# EAGLE board CT_schematic (EAGLE 7.6.0)

Size 204.93 x 80 mm. Coordinates in mm from the lower left corner, seen from the top.
Outline: 104.93,0 204.93,0 204.93,80 104.93,80 104.93,0
Copper layers (1*16): Top 0.035mm / dielectric 1.5mm / Bottom 0.035mm
Design rules "default": minimum track width 10mil, minimum drill 24mil, track to track 8mil, track to pad 8mil, pad to pad 8mil, via to via 8mil, smd to smd 8mil, copper to edge 40mil, drill to drill 8mil, minimum pad ring 10mil, minimum via ring 8mil, stop-mask expansion 4mil, vias tented up to drill 0mil, thermal gap 10mil

## Footprints (pad centres in the part's own frame; a part is rotated, then mirrored left to right if it is on the bottom)
C0402 = smd 0.5 x 0.5: 1 -0.508,0; 2 0.508,0
C0603 = smd 0.8 x 0.8: 1 -0.762,0; 2 0.762,0
C0805 = smd 1.2 x 1.3: 1 -1.016,0; 2 1.016,0
C1210 = smd 1.2 x 2.5: 1 -1.524,0; 2 1.524,0
C1206 = smd 1.3 x 1.6: 1 -1.524,0; 2 1.524,0
2220 = smd 1.85 x 5.5: 1 -2.55,0; 2 2.55,0
EXV-9B = smd 2.718 x 1.778: 1 -2.108,0; 2 2.108,0
R0603 = smd 0.8 x 0.8: 1 -0.762,0; 2 0.762,0
EXV-9H = smd 3.505 x 1.676: 1 -2.857,0; 2 2.857,0
IND_PM3316 = smd 2.921 x 2.794: 1 -5.144,0; 2 5.144,0
DR1040 = smd 1.6 x 3.2: 1 -4.458,0; 2 4.458,0
WE-HCI_7030/7040/7050 = smd 2.5 x 3: 1 -2.45,0; 2 2.45,0
PJ-037B_PACKAGE = drill 3.7 square: 1 12,0 | drill 3.2 square: 2 6,0
BFBGA-684 = smd 0.533 x 0.533: A1 -10.8,10.8; A2 -10,10.8; A3 -9.2,10.8; A4 -8.4,10.8; A5 -7.6,10.8; A6 -6.8,10.8; A7 -6,10.8; A8 -5.2,10.8; A9 -4.4,10.8; A10 -3.6,10.8; A11 -2.8,10.8; A12 -2,10.8; A13 -1.2,10.8; A14 -0.4,10.8; A15 0.4,10.8; A16 1.2,10.8; A17 2,10.8; A18 2.8,10.8; A19 3.6,10.8; A20 4.4,10.8; A21 5.2,10.8; A22 6,10.8; A23 6.8,10.8; A24 7.6,10.8; A25 8.4,10.8; A26 9.2,10.8; A27 10,10.8; A28 10.8,10.8; AA1 -10.8,-5.2; AA2 -10,-5.2; AA3 -9.2,-5.2; AA4 -8.4,-5.2; AA5 -7.6,-5.2; AA6 -6.8,-5.2; AA7 -6,-5.2; AA8 -5.2,-5.2; AA9 -4.4,-5.2; AA10 -3.6,-5.2; AA11 -2.8,-5.2; AA12 -2,-5.2; AA13 -1.2,-5.2; AA14 -0.4,-5.2; AA15 0.4,-5.2; AA16 1.2,-5.2; AA17 2,-5.2; AA18 2.8,-5.2; AA19 3.6,-5.2; AA20 4.4,-5.2; AA21 5.2,-5.2; AA22 6,-5.2; AA23 6.8,-5.2; AA24 7.6,-5.2; AA25 8.4,-5.2; AA26 9.2,-5.2; AA27 10,-5.2; AA28 10.8,-5.2; AB1 -10.8,-6; AB2 -10,-6; AB6 -6.8,-6; AB8 -5.2,-6; AB9 -4.4,-6; AB10 -3.6,-6; AB11 -2.8,-6; AB12 -2,-6; AB13 -1.2,-6; AB14 -0.4,-6; AB15 0.4,-6; AB16 1.2,-6; AB17 2,-6; AB18 2.8,-6; AB19 3.6,-6; AB20 4.4,-6; AB21 5.2,-6; AB23 6.8,-6; AB27 10,-6; AB28 10.8,-6; AC1 -10.8,-6.8; AC2 -10,-6.8; AC3 -9.2,-6.8; AC4 -8.4,-6.8; AC5 -7.6,-6.8; AC7 -6,-6.8; AC8 -5.2,-6.8; AC9 -4.4,-6.8; AC10 -3.6,-6.8; AC11 -2.8,-6.8; AC12 -2,-6.8; AC13 -1.2,-6.8; AC14 -0.4,-6.8; AC15 0.4,-6.8; AC16 1.2,-6.8; AC17 2,-6.8; AC18 2.8,-6.8; AC19 3.6,-6.8; AC20 4.4,-6.8; AC21 5.2,-6.8; AC22 6,-6.8; AC24 7.6,-6.8; AC25 8.4,-6.8; AC26 9.2,-6.8; AC27 10,-6.8; AC28 10.8,-6.8; AD1 -10.8,-7.6; AD2 -10,-7.6; AD3 -9.2,-7.6; AD4 -8.4,-7.6; AD6 -6.8,-7.6; AD8 -5.2,-7.6; AD9 -4.4,-7.6; AD11 -2.8,-7.6; AD12 -2,-7.6; AD14 -0.4,-7.6; AD15 0.4,-7.6; AD17 2,-7.6; AD18 2.8,-7.6; AD20 4.4,-7.6; AD21 5.2,-7.6; AD23 6.8,-7.6; AD25 8.4,-7.6; AD26 9.2,-7.6; AD27 10,-7.6; AD28 10.8,-7.6; AE1 -10.8,-8.4; AE2 -10,-8.4; AE3 -9.2,-8.4; AE5 -7.6,-8.4; AE6 -6.8,-8.4; AE8 -5.2,-8.4; AE9 -4.4,-8.4; AE11 -2.8,-8.4; AE12 -2,-8.4; AE14 -0.4,-8.4; AE15 0.4,-8.4; AE17 2,-8.4; AE18 2.8,-8.4; AE20 4.4,-8.4; AE21 5.2,-8.4; AE23 6.8,-8.4; AE24 7.6,-8.4; AE26 9.2,-8.4; AE27 10,-8.4; AE28 10.8,-8.4; AF1 -10.8,-9.2; AF2 -10,-9.2; AF3 -9.2,-9.2; AF4 -8.4,-9.2; AF5 -7.6,-9.2; AF6 -6.8,-9.2; AF8 -5.2,-9.2; AF9 -4.4,-9.2; AF11 -2.8,-9.2; AF12 -2,-9.2; AF14 -0.4,-9.2; AF15 0.4,-9.2; AF17 2,-9.2; AF18 2.8,-9.2; AF20 4.4,-9.2; AF21 5.2,-9.2; AF23 6.8,-9.2; AF24 7.6,-9.2; AF25 8.4,-9.2; AF26 9.2,-9.2; AF27 10,-9.2; AF28 10.8,-9.2; AG1 -10.8,-10; AG2 -10,-10; AG3 -9.2,-10; AG4 -8.4,-10; AG5 -7.6,-10; AG6 -6.8,-10; AG7 -6,-10; AG8 -5.2,-10; AG9 -4.4,-10; AG10 -3.6,-10; AG11 -2.8,-10; AG12 -2,-10; AG13 -1.2,-10; AG14 -0.4,-10; AG15 0.4,-10; AG16 1.2,-10; AG17 2,-10; AG18 2.8,-10; AG19 3.6,-10; AG20 4.4,-10; AG21 5.2,-10; AG22 6,-10; AG23 6.8,-10; AG24 7.6,-10; AG25 8.4,-10; AG26 9.2,-10; AG27 10,-10; AG28 10.8,-10; AH1 -10.8,-10.8; AH2 -10,-10.8; AH3 -9.2,-10.8; AH4 -8.4,-10.8; AH5 -7.6,-10.8; AH6 -6.8,-10.8; AH7 -6,-10.8; AH8 -5.2,-10.8; AH9 -4.4,-10.8; AH10 -3.6,-10.8; AH11 -2.8,-10.8; AH12 -2,-10.8; AH13 -1.2,-10.8; AH14 -0.4,-10.8; AH15 0.4,-10.8; AH16 1.2,-10.8; AH17 2,-10.8; AH18 2.8,-10.8; AH19 3.6,-10.8; AH20 4.4,-10.8; AH21 5.2,-10.8; AH22 6,-10.8; AH23 6.8,-10.8; AH24 7.6,-10.8; AH25 8.4,-10.8; AH26 9.2,-10.8; AH27 10,-10.8; AH28 10.8,-10.8; B1 -10.8,10; B2 -10,10; B3 -9.2,10; B4 -8.4,10; B5 -7.6,10; B6 -6.8,10; B7 -6,10; B8 -5.2,10; B9 -4.4,10; B10 -3.6,10; B11 -2.8,10; B12 -2,10; B13 -1.2,10; B14 -0.4,10; B15 0.4,10; B16 1.2,10; B17 2,10; B18 2.8,10; B19 3.6,10; B20 4.4,10; B21 5.2,10; B22 6,10; B23 6.8,10; B24 7.6,10; B25 8.4,10; B26 9.2,10; B27 10,10; B28 10.8,10; C1 -10.8,9.2; C2 -10,9.2; C3 -9.2,9.2; C4 -8.4,9.2; C5 -7.6,9.2; C6 -6.8,9.2; C8 -5.2,9.2; C9 -4.4,9.2; C11 -2.8,9.2; C12 -2,9.2; C14 -0.4,9.2; C15 0.4,9.2; C17 2,9.2; C18 2.8,9.2; C20 4.4,9.2; C21 5.2,9.2; C23 6.8,9.2; C24 7.6,9.2; C25 8.4,9.2; C26 9.2,9.2; C27 10,9.2; C28 10.8,9.2; D1 -10.8,8.4; D2 -10,8.4; D3 -9.2,8.4; D5 -7.6,8.4; D6 -6.8,8.4; D8 -5.2,8.4; D9 -4.4,8.4; D11 -2.8,8.4; D12 -2,8.4; D14 -0.4,8.4; D15 0.4,8.4; D17 2,8.4; D18 2.8,8.4; D20 4.4,8.4; D21 5.2,8.4; D23 6.8,8.4; D24 7.6,8.4; D26 9.2,8.4; D27 10,8.4; D28 10.8,8.4; E1 -10.8,7.6; E2 -10,7.6; E3 -9.2,7.6; E4 -8.4,7.6; E6 -6.8,7.6; E8 -5.2,7.6; E9 -4.4,7.6; E11 -2.8,7.6; E12 -2,7.6; E14 -0.4,7.6; E15 0.4,7.6; E17 2,7.6; E18 2.8,7.6; E20 4.4,7.6; E21 5.2,7.6; E23 6.8,7.6; E25 8.4,7.6; E26 9.2,7.6; E27 10,7.6; E28 10.8,7.6; F1 -10.8,6.8; F2 -10,6.8; F3 -9.2,6.8; F4 -8.4,6.8; F5 -7.6,6.8; F7 -6,6.8; F8 -5.2,6.8; F9 -4.4,6.8; F10 -3.6,6.8; F11 -2.8,6.8; F12 -2,6.8; F13 -1.2,6.8; F14 -0.4,6.8; F15 0.4,6.8; F16 1.2,6.8; F17 2,6.8; F18 2.8,6.8; F19 3.6,6.8; F20 4.4,6.8; F21 5.2,6.8; F22 6,6.8; F24 7.6,6.8; F25 8.4,6.8; F26 9.2,6.8; F27 10,6.8; F28 10.8,6.8; G1 -10.8,6; G2 -10,6; G6 -6.8,6; G8 -5.2,6; G9 -4.4,6; G10 -3.6,6; G11 -2.8,6; G12 -2,6; G13 -1.2,6; G14 -0.4,6; G15 0.4,6; G16 1.2,6; G17 2,6; G18 2.8,6; G19 3.6,6; G20 4.4,6; G21 5.2,6; G23 6.8,6; G27 10,6; G28 10.8,6; H1 -10.8,5.2; H2 -10,5.2; H3 -9.2,5.2; H4 -8.4,5.2; H5 -7.6,5.2; H6 -6.8,5.2; H7 -6,5.2; H8 -5.2,5.2; H9 -4.4,5.2; H10 -3.6,5.2; H11 -2.8,5.2; H12 -2,5.2; H13 -1.2,5.2; H14 -0.4,5.2; H15 0.4,5.2; H16 1.2,5.2; H17 2,5.2; H18 2.8,5.2; H19 3.6,5.2; H20 4.4,5.2; H21 5.2,5.2; H22 6,5.2; H23 6.8,5.2; H24 7.6,5.2; H25 8.4,5.2; H26 9.2,5.2; H27 10,5.2; H28 10.8,5.2; J1 -10.8,4.4; J2 -10,4.4; J3 -9.2,4.4; J4 -8.4,4.4; J5 -7.6,4.4; J6 -6.8,4.4; J7 -6,4.4; J10 -3.6,4.4; J11 -2.8,4.4; J12 -2,4.4; J13 -1.2,4.4; J14 -0.4,4.4; J15 0.4,4.4; J16 1.2,4.4; J17 2,4.4; J18 2.8,4.4; J19 3.6,4.4; J22 6,4.4; J23 6.8,4.4; J24 7.6,4.4; J25 8.4,4.4; J26 9.2,4.4; J27 10,4.4; J28 10.8,4.4; K1 -10.8,3.6; K2 -10,3.6; K6 -6.8,3.6; K7 -6,3.6; K9 -4.4,3.6; K10 -3.6,3.6; K11 -2.8,3.6; K12 -2,3.6; K13 -1.2,3.6; K14 -0.4,3.6; K15 0.4,3.6; K16 1.2,3.6; K17 2,3.6; K18 2.8,3.6; K19 3.6,3.6; K20 4.4,3.6; K22 6,3.6; K23 6.8,3.6; K27 10,3.6; K28 10.8,3.6; L1 -10.8,2.8; L2 -10,2.8; L3 -9.2,2.8; L4 -8.4,2.8; L5 -7.6,2.8; L6 -6.8,2.8; L7 -6,2.8; L8 -5.2,2.8; L9 -4.4,2.8; L10 -3.6,2.8; L11 -2.8,2.8; L12 -2,2.8; L13 -1.2,2.8; L14 -0.4,2.8; L15 0.4,2.8; L16 1.2,2.8; L17 2,2.8; L18 2.8,2.8; L19 3.6,2.8; L20 4.4,2.8; L21 5.2,2.8; L22 6,2.8; L23 6.8,2.8; L24 7.6,2.8; L25 8.4,2.8; L26 9.2,2.8; L27 10,2.8; L28 10.8,2.8; M1 -10.8,2; M2 -10,2; M3 -9.2,2; M4 -8.4,2; M5 -7.6,2; M6 -6.8,2; M7 -6,2; M8 -5.2,2; M9 -4.4,2; M10 -3.6,2; M11 -2.8,2; M12 -2,2; M13 -1.2,2; M14 -0.4,2; M15 0.4,2; M16 1.2,2; M17 2,2; M18 2.8,2; M19 3.6,2; M20 4.4,2; M21 5.2,2; M22 6,2; M23 6.8,2; M24 7.6,2; M25 8.4,2; M26 9.2,2; M27 10,2; M28 10.8,2; N1 -10.8,1.2; N2 -10,1.2; N6 -6.8,1.2; N7 -6,1.2; N8 -5.2,1.2; N9 -4.4,1.2; N10 -3.6,1.2; N11 -2.8,1.2; N12 -2,1.2; N13 -1.2,1.2; N14 -0.4,1.2; N15 0.4,1.2; N16 1.2,1.2; N17 2,1.2; N18 2.8,1.2; N19 3.6,1.2; N20 4.4,1.2; N21 5.2,1.2; N22 6,1.2; N23 6.8,1.2; N27 10,1.2; N28 10.8,1.2; P1 -10.8,0.4; P2 -10,0.4; P3 -9.2,0.4; P4 -8.4,0.4; P5 -7.6,0.4; P6 -6.8,0.4; P7 -6,0.4; P8 -5.2,0.4; P9 -4.4,0.4; P10 -3.6,0.4; P11 -2.8,0.4; P12 -2,0.4; P13 -1.2,0.4; P14 -0.4,0.4; P15 0.4,0.4; P16 1.2,0.4; P17 2,0.4; P18 2.8,0.4; P19 3.6,0.4; P20 4.4,0.4; P21 5.2,0.4; P22 6,0.4; P23 6.8,0.4; P24 7.6,0.4; P25 8.4,0.4; P26 9.2,0.4; P27 10,0.4; P28 10.8,0.4; R1 -10.8,-0.4; R2 -10,-0.4; R3 -9.2,-0.4; R4 -8.4,-0.4; R5 -7.6,-0.4; R6 -6.8,-0.4; R7 -6,-0.4; R8 -5.2,-0.4; R9 -4.4,-0.4; R10 -3.6,-0.4; R11 -2.8,-0.4; R12 -2,-0.4; R13 -1.2,-0.4; R14 -0.4,-0.4; R15 0.4,-0.4; R16 1.2,-0.4; R17 2,-0.4; R18 2.8,-0.4; R19 3.6,-0.4; R20 4.4,-0.4; R21 5.2,-0.4; R22 6,-0.4; R23 6.8,-0.4; R24 7.6,-0.4; R25 8.4,-0.4; R26 9.2,-0.4; R27 10,-0.4; R28 10.8,-0.4; T1 -10.8,-1.2; T2 -10,-1.2; T6 -6.8,-1.2; T7 -6,-1.2; T8 -5.2,-1.2; T9 -4.4,-1.2; T10 -3.6,-1.2; T11 -2.8,-1.2; T12 -2,-1.2; T13 -1.2,-1.2; T14 -0.4,-1.2; T15 0.4,-1.2; T16 1.2,-1.2; T17 2,-1.2; T18 2.8,-1.2; T19 3.6,-1.2; T20 4.4,-1.2; T21 5.2,-1.2; T22 6,-1.2; T23 6.8,-1.2; T27 10,-1.2; T28 10.8,-1.2; U1 -10.8,-2; U2 -10,-2; U3 -9.2,-2; U4 -8.4,-2; U5 -7.6,-2; U6 -6.8,-2; U7 -6,-2; U8 -5.2,-2; U9 -4.4,-2; U10 -3.6,-2; U11 -2.8,-2; U12 -2,-2; U13 -1.2,-2; U14 -0.4,-2; U15 0.4,-2; U16 1.2,-2; U17 2,-2; U18 2.8,-2; U19 3.6,-2; U20 4.4,-2; U21 5.2,-2; U22 6,-2; U23 6.8,-2; U24 7.6,-2; U25 8.4,-2; U26 9.2,-2; U27 10,-2; U28 10.8,-2; V1 -10.8,-2.8; V2 -10,-2.8; V3 -9.2,-2.8; V4 -8.4,-2.8; V5 -7.6,-2.8; V6 -6.8,-2.8; V7 -6,-2.8; V8 -5.2,-2.8; V9 -4.4,-2.8; V10 -3.6,-2.8; V11 -2.8,-2.8; V12 -2,-2.8; V13 -1.2,-2.8; V14 -0.4,-2.8; V15 0.4,-2.8; V16 1.2,-2.8; V17 2,-2.8; V18 2.8,-2.8; V19 3.6,-2.8; V20 4.4,-2.8; V21 5.2,-2.8; V22 6,-2.8; V23 6.8,-2.8; V24 7.6,-2.8; V25 8.4,-2.8; V26 9.2,-2.8; V27 10,-2.8; V28 10.8,-2.8; W1 -10.8,-3.6; W2 -10,-3.6; W6 -6.8,-3.6; W7 -6,-3.6; W9 -4.4,-3.6; W10 -3.6,-3.6; W11 -2.8,-3.6; W12 -2,-3.6; W13 -1.2,-3.6; W14 -0.4,-3.6; W15 0.4,-3.6; W16 1.2,-3.6; W17 2,-3.6; W18 2.8,-3.6; W19 3.6,-3.6; W20 4.4,-3.6; W22 6,-3.6; W23 6.8,-3.6; W27 10,-3.6; W28 10.8,-3.6; Y1 -10.8,-4.4; Y2 -10,-4.4; Y3 -9.2,-4.4; Y4 -8.4,-4.4; Y5 -7.6,-4.4; Y6 -6.8,-4.4; Y7 -6,-4.4; Y10 -3.6,-4.4; Y11 -2.8,-4.4; Y12 -2,-4.4; Y13 -1.2,-4.4; Y14 -0.4,-4.4; Y15 0.4,-4.4; Y16 1.2,-4.4; Y17 2,-4.4; Y18 2.8,-4.4; Y19 3.6,-4.4; Y22 6,-4.4; Y23 6.8,-4.4; Y24 7.6,-4.4; Y25 8.4,-4.4; Y26 9.2,-4.4; Y27 10,-4.4; Y28 10.8,-4.4
MD-40S = drill 1 pad 1.8 square: 1 -6.8,0 | drill 1 pad 1.8: 2 0,0; 3 -6.8,-2.5; 4 0,-2.5 | drill 2.2: 5 -3.4,3.8
SOT-23-6 = smd 1.1 x 0.6: 1 -1.4,0.95; 2 -1.4,0; 3 -1.4,-0.95; 4 1.4,-0.95; 5 1.4,0; 6 1.4,0.95
SOIC-8 = smd 1.6 x 0.6: 1 -2.7,1.905 | smd 1.55 x 0.6: 2 -2.7,0.635; 3 -2.7,-0.635; 4 -2.7,-1.905; 5 2.7,-1.905; 6 2.7,-0.635; 7 2.7,0.635; 8 2.7,1.905
LGA14R35P5X6_200X200X100 = smd 0.35 x 0.15: 1 -0.8,0.525; 2 -0.8,0.175; 3 -0.8,-0.175; 4 -0.8,-0.525; 8 0.8,-0.525; 9 0.8,-0.175; 10 0.8,0.175; 11 0.8,0.525 | smd 0.15 x 0.35: 5 -0.35,-0.8; 6 0,-0.8; 7 0.35,-0.8; 12 0.35,0.8; 13 0,0.8; 14 -0.35,0.8
182-009-MALE = drill 1.194 pad 1.524 octagon: 1 -5.537,10.923; 2 -2.769,10.923; 3 0,10.923; 4 2.769,10.923; 5 5.537,10.923; 6 -4.153,8.08; 7 -1.384,8.08; 8 1.384,8.08; 9 4.153,8.08 | hole 3.048: -12.446,9.501; 12.446,9.501
LBGA-64 = smd 0.559 x 0.559: A1 -3.5,3.5; A2 -2.5,3.5; A3 -1.5,3.5; A4 -0.5,3.5; A5 0.5,3.5; A6 1.5,3.5; A7 2.5,3.5; A8 3.5,3.5; B1 -3.5,2.5; B2 -2.5,2.5; B3 -1.5,2.5; B4 -0.5,2.5; B5 0.5,2.5; B6 1.5,2.5; B7 2.5,2.5; B8 3.5,2.5; C1 -3.5,1.5; C2 -2.5,1.5; C3 -1.5,1.5; C4 -0.5,1.5; C5 0.5,1.5; C6 1.5,1.5; C7 2.5,1.5; C8 3.5,1.5; D1 -3.5,0.5; D2 -2.5,0.5; D3 -1.5,0.5; D4 -0.5,0.5; D5 0.5,0.5; D6 1.5,0.5; D7 2.5,0.5; D8 3.5,0.5; E1 -3.5,-0.5; E2 -2.5,-0.5; E3 -1.5,-0.5; E4 -0.5,-0.5; E5 0.5,-0.5; E6 1.5,-0.5; E7 2.5,-0.5; E8 3.5,-0.5; F1 -3.5,-1.5; F2 -2.5,-1.5; F3 -1.5,-1.5; F4 -0.5,-1.5; F5 0.5,-1.5; F6 1.5,-1.5; F7 2.5,-1.5; F8 3.5,-1.5; G1 -3.5,-2.5; G2 -2.5,-2.5; G3 -1.5,-2.5; G4 -0.5,-2.5; G5 0.5,-2.5; G6 1.5,-2.5; G7 2.5,-2.5; G8 3.5,-2.5; H1 -3.5,-3.5; H2 -2.5,-3.5; H3 -1.5,-3.5; H4 -0.5,-3.5; H5 0.5,-3.5; H6 1.5,-3.5; H7 2.5,-3.5; H8 3.5,-3.5
RTL8201FL-VB-CG = smd 0.27 x 1: 1 0,0; 2 0.5,0; 3 1,0; 4 1.5,0; 5 2,0; 6 2.5,0; 7 3,0; 8 3.5,0; 9 4,0; 10 4.5,0; 11 5,0; 12 5.5,0; 25 5.5,8; 26 5,8; 27 4.5,8; 28 4,8; 29 3.5,8; 30 3,8; 31 2.5,8; 32 2,8; 33 1.5,8; 34 1,8; 35 0.5,8; 36 0,8 | smd 1 x 0.27: 13 6.75,1.25; 14 6.75,1.75; 15 6.75,2.25; 16 6.75,2.75; 17 6.75,3.25; 18 6.75,3.75; 19 6.75,4.25; 20 6.75,4.75; 21 6.75,5.25; 22 6.75,5.75; 23 6.75,6.25; 24 6.75,6.75; 37 -1.25,6.75; 38 -1.25,6.25; 39 -1.25,5.75; 40 -1.25,5.25; 41 -1.25,4.75; 42 -1.25,4.25; 43 -1.25,3.75; 44 -1.25,3.25; 45 -1.25,2.75; 46 -1.25,2.25; 47 -1.25,1.75; 48 -1.25,1.25
7498011122R = smd 0.71 x 2.29: 1 -3.545,-3.18; 2 -2.525,-3.18; 3 -1.505,-3.18; 4 -0.485,-3.18; 5 0.535,-3.18; 6 1.555,-3.18; 8 3.595,-3.18; 9 5.635,-3.18; 10 6.655,-3.18; 11 -6.605,-3.18; 12 -5.585,-3.18 | smd 1.4 x 2.54: 13 -8.51,10.2; 14 8.51,10.2 | hole 1.4: -3.5,0; 3.5,0
MICRO_USB_AB = smd 0.4 x 1.35: 1 1.3,0.26; 2 0.65,0.26; 3 0,0.26; 4 -0.65,0.26; 5 -1.3,0.26 | drill 0.6 pad 0.95 long: 6 4.175,-2.54; 7 -4.175,-2.54 | drill 0.7 pad 1.1 long: 8 -2.225,0.46; 9 2.225,0.46
SOT143B = smd 1 x 0.7: 1 -0.75,-1 | smd 0.6 x 0.7: 2 0.95,-1; 3 0.95,1; 4 -0.95,1
ABLS-20.000MHZ-B4-T = smd 5.6 x 2.8: 1 -3.81,0; 2 5.69,0
ABLS-25.000MHZ-B2F-T = smd 5.6 x 2.8: 1 -3.81,0; 2 5.69,0
HTSSOP14 = smd 1.676 x 0.356: 1 -2.8,1.95; 2 -2.8,1.3; 3 -2.8,0.65; 4 -2.8,0; 5 -2.8,-0.65; 6 -2.8,-1.3; 7 -2.8,-1.95; 8 2.8,-1.95; 9 2.8,-1.3; 10 2.8,-0.65; 11 2.8,0; 12 2.8,0.65; 13 2.8,1.3; 14 2.8,1.95 | smd 3 x 5: 15 0,0 | drill 0.4 pad 0.45: P$1 -0.75,1.5; P$2 0.75,1.5; P$3 -0.75,0; P$4 0.8,0; P$5 -0.75,-1.5; P$6 0.9,-1.5
WSON-8 = smd 0.3 x 0.6: 1 -0.75,0; 2 0.05,0; 3 0.85,0; 4 1.65,0; 5 1.65,3.8; 6 0.85,3.8; 7 0.05,3.8; 8 -0.75,3.8 | smd 3 x 2.6: PAD 0.45,1.9
QFN-16_EP = smd 0.805 x 0.3: 1 -1.452,0.75; 2 -1.452,0.25; 3 -1.452,-0.25; 4 -1.452,-0.75; 9 1.452,-0.75; 10 1.452,-0.25; 11 1.452,0.25; 12 1.452,0.75 | smd 0.3 x 0.805: 5 -0.75,-1.452; 6 -0.25,-1.452; 7 0.25,-1.452; 8 0.75,-1.452; 13 0.75,1.452; 14 0.25,1.452; 15 -0.25,1.452; 16 -0.75,1.452 | smd 1.55 x 1.55: 17 0,0
LP2954 = smd 1.6 x 0.6: 1 -2.475,1.905 | smd 1.55 x 0.6: 2 -2.475,0.635; 3 -2.475,-0.635; 4 -2.475,-1.905; 5 2.475,-1.905; 6 2.475,-0.635; 7 2.475,0.635; 8 2.475,1.905
QFN-38_UHF = smd 0.75 x 0.3: 1 -2.4,2.75; 2 -2.4,2.25; 3 -2.4,1.75; 4 -2.4,1.25; 6 -2.4,0.25; 7 -2.4,-0.25; 8 -2.4,-0.75; 9 -2.4,-1.25; 10 -2.4,-1.75; 11 -2.4,-2.25; 12 -2.4,-2.75; 20 2.4,-2.75; 21 2.4,-2.25; 22 2.4,-1.75; 23 2.4,-1.25; 24 2.4,-0.75; 25 2.4,-0.25; 26 2.4,0.25; 27 2.4,0.75; 28 2.4,1.25; 29 2.4,1.75; 30 2.4,2.25; 31 2.4,2.75 | smd 0.758 x 0.3: 5 -2.4,0.75 | smd 0.3 x 0.75: 13 -1.5,-3.4; 14 -1,-3.4; 15 -0.5,-3.4; 16 0,-3.4; 17 0.5,-3.4; 18 1,-3.4; 19 1.5,-3.4; 32 1.5,3.4; 33 1,3.4; 34 0.5,3.4; 35 0,3.4; 36 -0.5,3.4; 37 -1,3.4; 38 -1.5,3.4 | smd 3.2 x 5.2: 39 0,0
IRF8306MTRPBF = smd 0.9 x 1.85: 1 0,0; 2 0,-2.35; 6 6.4,0; 7 6.4,-2.35 | smd 0.75 x 0.75: 3 1.75,-1.175 | smd 1.45 x 0.87: 4 3.5,-0.565; 5 3.5,-1.785
SW_4-1437565-2 = smd 1.4 x 2.1: 1 -2.23,4.55; 2 -2.23,-4.55; 3 2.23,4.55; 4 2.23,-4.55
LGM67K-G1J2-24-Z = smd 0.8 x 1.4: A -2,0; C 0,0
NC7SZ125M5X = smd 1.3 x 0.7: 1 -1.3,0.95; 2 -1.3,0; 3 -1.3,-0.95; 4 1.3,-0.95; 5 1.3,0.95

## Placement (x,y rotation side)
C1  1.2e-11  [C0402]  not placed on the board
C2  1.2e-11  [C0402]  not placed on the board
C3  1.2e-11  [C0402]  not placed on the board
C4  1.2e-11  [C0402]  not placed on the board
C5  1e-07  [C0402]  not placed on the board
C6  1e-07  [C0402]  not placed on the board
C7  1e-07  [C0402]  not placed on the board
C8  1e-07  [C0402]  not placed on the board
C9  1e-06  [C0603]  not placed on the board
C10  1e-06  [C0603]  not placed on the board
C11  1e-06  [C0603]  not placed on the board
C12  1e-06  [C0603]  not placed on the board
C13  1e-06  [C0603]  not placed on the board
C14  1e-06  [C0603]  not placed on the board
C15  1e-06  [C0603]  not placed on the board
C16  1e-06  [C0603]  not placed on the board
C17  1e-06  [C0603]  not placed on the board
C18  1e-06  [C0603]  not placed on the board
C19  1e-06  [C0603]  not placed on the board
C20  1e-05  [C0805]  8.41,73.66 0 top
C21  1e-07  [C0402]  not placed on the board
C22  1e-07  [C0402]  not placed on the board
C23  1e-07  [C0402]  not placed on the board
C24  1e-07  [C0402]  not placed on the board
C25  1e-07  [C0402]  not placed on the board
C26  1e-07  [C0402]  not placed on the board
C27  1e-07  [C0402]  not placed on the board
C28  1e-07  [C0402]  not placed on the board
C29  1e-07  [C0402]  not placed on the board
C30  1e-07  [C0402]  not placed on the board
C31  1e-08  [C0402]  not placed on the board
C32  1e-08  [C0402]  not placed on the board
C33  1e-08  [C0402]  not placed on the board
C34  1e-08  [C0402]  not placed on the board
C35  1e-08  [C0402]  not placed on the board
C36  1e-08  [C0402]  not placed on the board
C37  1e-08  [C0402]  not placed on the board
C38  1e-08  [C0402]  not placed on the board
C39  1e-08  [C0402]  not placed on the board
C40  1e-08  [C0402]  not placed on the board
C41  1e-05  [C0805]  3.33,73.66 0 top
C42  1e-07  [C0402]  not placed on the board
C43  1e-07  [C0402]  not placed on the board
C44  1e-07  [C0402]  not placed on the board
C45  1e-07  [C0402]  not placed on the board
C46  1e-07  [C0402]  not placed on the board
C47  1e-07  [C0402]  not placed on the board
C48  1e-07  [C0402]  not placed on the board
C49  1e-07  [C0402]  not placed on the board
C50  1e-07  [C0402]  not placed on the board
C51  1e-07  [C0402]  not placed on the board
C52  1e-07  [C0402]  not placed on the board
C53  1e-07  [C0402]  not placed on the board
C54  1e-07  [C0402]  not placed on the board
C55  1e-07  [C0402]  not placed on the board
C56  1e-07  [C0402]  not placed on the board
C57  1e-07  [C0402]  not placed on the board
C58  1e-07  [C0402]  not placed on the board
C59  1e-07  [C0402]  not placed on the board
C60  1e-07  [C0402]  not placed on the board
C61  1e-07  [C0402]  not placed on the board
C62  1e-07  [C0402]  not placed on the board
C63  1e-07  [C0402]  not placed on the board
C64  1e-05  [C0805]  -1.75,73.66 0 top
C65  1e-07  [C0402]  not placed on the board
C66  1e-07  [C0402]  not placed on the board
C67  1e-07  [C0402]  not placed on the board
C68  1e-07  [C0402]  not placed on the board
C69  1e-07  [C0402]  not placed on the board
C70  1e-07  [C0402]  not placed on the board
C71  1e-07  [C0402]  not placed on the board
C72  1e-05  [C0805]  not placed on the board
C73  1e-07  [C0402]  not placed on the board
C74  1e-07  [C0402]  not placed on the board
C75  1e-07  [C0402]  not placed on the board
C76  1e-07  [C0402]  not placed on the board
C77  1e-07  [C0402]  not placed on the board
C78  1e-07  [C0402]  not placed on the board
C79  1e-07  [C0402]  not placed on the board
C80  1e-07  [C0402]  not placed on the board
C81  1e-05  [C0805]  not placed on the board
C82  1e-07  [C0402]  not placed on the board
C83  1e-07  [C0402]  not placed on the board
C84  1e-07  [C0402]  not placed on the board
C85  1e-07  [C0402]  not placed on the board
C86  1e-07  [C0402]  not placed on the board
C87  1e-05  [C0805]  89.69,80.01 0 top
C88  1e-08  [C0402]  not placed on the board
C89  1e-08  [C0402]  not placed on the board
C90  1e-08  [C0402]  not placed on the board
C91  1e-08  [C0402]  not placed on the board
C92  1e-08  [C0402]  not placed on the board
C93  1e-08  [C0402]  not placed on the board
C94  1e-08  [C0402]  not placed on the board
C95  1e-08  [C0402]  not placed on the board
C96  1e-08  [C0402]  not placed on the board
C97  1e-08  [C0402]  not placed on the board
C98  1e-05  [C0805]  84.61,80.01 0 top
C99  1e-08  [C0402]  not placed on the board
C100  1e-08  [C0402]  not placed on the board
C101  1e-08  [C0402]  not placed on the board
C102  1e-08  [C0402]  not placed on the board
C103  1e-08  [C0402]  not placed on the board
C104  1e-08  [C0402]  not placed on the board
C105  1e-08  [C0402]  not placed on the board
C106  1e-08  [C0402]  not placed on the board
C107  1e-08  [C0402]  not placed on the board
C108  1e-08  [C0402]  not placed on the board
C109  1e-05  [C0805]  79.53,80.01 0 top
C110  1e-08  [C0402]  not placed on the board
C111  1e-08  [C0402]  not placed on the board
C112  1e-08  [C0402]  not placed on the board
C113  1e-08  [C0402]  not placed on the board
C114  1e-08  [C0402]  not placed on the board
C115  1e-08  [C0402]  not placed on the board
C116  1e-08  [C0402]  not placed on the board
C117  1e-08  [C0402]  not placed on the board
C118  1e-08  [C0402]  not placed on the board
C119  1e-08  [C0402]  not placed on the board
C120  1e-08  [C0402]  not placed on the board
C121  1e-08  [C0402]  not placed on the board
C122  1e-08  [C0402]  not placed on the board
C123  1e-08  [C0402]  not placed on the board
C124  1e-08  [C0402]  not placed on the board
C125  1e-08  [C0402]  not placed on the board
C126  1e-08  [C0402]  not placed on the board
C127  1e-08  [C0402]  not placed on the board
C128  1e-08  [C0402]  not placed on the board
C129  1e-08  [C0402]  not placed on the board
C130  1e-08  [C0402]  not placed on the board
C131  1e-08  [C0402]  not placed on the board
C132  1e-08  [C0402]  not placed on the board
C133  1e-08  [C0402]  not placed on the board
C134  1e-08  [C0402]  not placed on the board
C135  1e-07  [C0402]  not placed on the board
C136  1e-07  [C0402]  not placed on the board
C137  1e-06  [C0603]  not placed on the board
C138  1e-06  [C0603]  not placed on the board
C139  1e-08  [C0402]  not placed on the board
C140  1e-08  [C0402]  not placed on the board
C141  2.2e-08  [C0402]  not placed on the board
C142  1e-06  [C0603]  not placed on the board
C143  1e-07  [C0402]  not placed on the board
C144  1e-08  [C0402]  not placed on the board
C145  1e-06  [C0603]  not placed on the board
C146  1e-07  [C0402]  not placed on the board
C147  1e-08  [C0402]  not placed on the board
C148  1e-07  [C0402]  not placed on the board
C149  1e-07  [C0402]  not placed on the board
C150  2.7e-11  [C0402]  not placed on the board
C151  2.7e-11  [C0402]  not placed on the board
C152  1e-06  [C0603]  not placed on the board
C153  3.3e-09  [C0402]  not placed on the board
C154  1e-07  [C0402]  not placed on the board
C155  2.2e-05  [C1210]  -3.02,66.04 0 top
C156  2.2e-05  [C1210]  not placed on the board
C157  1e-05  [C1206]  69.37,73.66 0 top
C158  1e-05  [C1206]  63.02,73.66 0 top
C159  1e-08  [C0402]  not placed on the board
C160  1e-05  [C1206]  56.67,73.66 0 top
C161  1e-05  [C1210]  88.42,73.66 0 top
C162  1e-05  [C0805]  74.45,80.01 0 top
C163  1e-06  [C0603]  not placed on the board
C164  1e-07  [C0402]  not placed on the board
C165  6.8e-05  [2220]  88.42,58.42 0 top
C166  1e-06  [EXV-9B]  49.05,73.66 0 top
C167  2.2e-06  [EXV-9B]  40.16,73.66 0 top
C168  1e-05  [C0805]  69.37,80.01 0 top
C169  1e-06  [C0603]  not placed on the board
C170  1e-07  [C0402]  not placed on the board
C171  6.8e-05  [2220]  80.8,58.42 0 top
C172  1e-06  [C0603]  not placed on the board
C173  1e-05  [C1210]  82.07,73.66 0 top
C174  1e-06  [C0603]  not placed on the board
C175  1e-05  [C1210]  75.72,73.66 0 top
C176  1e-07  [C0402]  not placed on the board
C177  2.2e-06  [C0603]  not placed on the board
C178  2.45e-08  [R0603]  not placed on the board
C179  2.8258362168397e-09  [R0603]  59.21,80.01 0 top
C180  7.105e-09  [R0603]  49.05,80.01 0 top
C181  0.0001  [EXV-9H]  7.14,57.15 0 top
C182  0.0001  [EXV-9H]  -4.29,57.15 0 top
C183  1e-08  [C0402]  not placed on the board
C184  1e-08  [C0402]  not placed on the board
C185  1e-08  [C0402]  not placed on the board
I1  97.0  [R0603]  not placed on the board
I5  1.5e-06  [IND_PM3316]  -0.48,34.29 0 top
I6  2.5e-06  [DR1040]  12.22,34.29 0 top
I7  3.3e-06  [WE-HCI_7030/7040/7050]  41.43,34.29 0 top
J1  PJ-037B  [PJ-037B_PACKAGE]  60.48,35.56 0 top
R1  4700.0  [R0603]  not placed on the board
R2  4700.0  [R0603]  not placed on the board
R3  4700.0  [R0603]  not placed on the board
R4  4700.0  [R0603]  not placed on the board
R5  2200.0  [R0603]  not placed on the board
R6  2200.0  [R0603]  not placed on the board
R7  2200.0  [R0603]  not placed on the board
R8  2200.0  [R0603]  not placed on the board
R9  47000.0  [R0603]  not placed on the board
R10  49.9  [R0603]  not placed on the board
R11  49.9  [R0603]  not placed on the board
R12  2700.0  [R0603]  not placed on the board
R13  2700.0  [R0603]  not placed on the board
R14  100000.0  [R0603]  43.97,80.01 0 top
R15  100000.0  [R0603]  38.89,80.01 0 top
R16  100000.0  [R0603]  33.81,80.01 0 top
R17  0.1  [R0603]  not placed on the board
R18  100000.0  [R0603]  28.73,80.01 0 top
R19  100000.0  [R0603]  23.65,80.01 0 top
R20  100000.0  [R0603]  18.57,80.01 0 top
R21  100000.0  [R0603]  13.49,80.01 0 top
R22  100000.0  [R0603]  8.41,80.01 0 top
R23  100000.0  [R0603]  3.33,80.01 0 top
R24  100000.0  [R0603]  -1.75,80.01 0 top
R25  100000.0  [R0603]  not placed on the board
R26  100000.0  [R0603]  not placed on the board
R27  100000.0  [R0603]  not placed on the board
R28  100000.0  [R0603]  not placed on the board
R29  100000.0  [R0603]  not placed on the board
R30  100000.0  [R0603]  not placed on the board
R31  10000.0  [R0603]  not placed on the board
R32  10000.0  [R0603]  not placed on the board
R33  10000.0  [R0603]  not placed on the board
R34  10000.0  [R0603]  not placed on the board
R35  120.0  [R0603]  not placed on the board
R36  10000.0  [R0603]  not placed on the board
R37  10000.0  [R0603]  not placed on the board
R38  10000.0  [R0603]  not placed on the board
R39  10000.0  [R0603]  not placed on the board
R40  10000.0  [R0603]  not placed on the board
R41  0.1  [R0603]  not placed on the board
R42  0.1  [R0603]  not placed on the board
R43  200.0  [R0603]  not placed on the board
R44  200.0  [R0603]  not placed on the board
R45  2490.0  [R0603]  not placed on the board
R46  4700.0  [R0603]  not placed on the board
R47  10000.0  [R0603]  not placed on the board
R48  10000.0  [R0603]  not placed on the board
R49  10000.0  [R0603]  not placed on the board
R50  10000.0  [R0603]  not placed on the board
R51  10000.0  [R0603]  not placed on the board
R52  10000.0  [R0603]  not placed on the board
R53  15000.0  [R0603]  not placed on the board
R54  22000.0  [R0603]  not placed on the board
R55  100000.0  [R0603]  not placed on the board
R56  3900.0  [R0603]  not placed on the board
R57  1000.0  [R0603]  not placed on the board
R58  20000.0  [R0603]  not placed on the board
R59  27000.0  [R0603]  not placed on the board
R60  300000.0  [R0603]  not placed on the board
R61  100000.0  [R0603]  not placed on the board
R62  100000.0  [R0603]  not placed on the board
R63  47000.0  [R0603]  not placed on the board
R64  100000.0  [R0603]  not placed on the board
R65  20000.0  [R0603]  not placed on the board
R66  91000.0  [R0603]  not placed on the board
R67  300000.0  [R0603]  not placed on the board
R68  100000.0  [R0603]  not placed on the board
R69  300000.0  [R0603]  not placed on the board
R70  100000.0  [R0603]  not placed on the board
R71  100000.0  [R0603]  not placed on the board
R72  153694.38  [R0603]  54.13,80.01 0 top
R73  100000.0  [R0603]  not placed on the board
R74  10000.0  [R0603]  not placed on the board
R75  75000.0  [R0603]  not placed on the board
R76  10000.0  [R0603]  not placed on the board
R77  10000.0  [R0603]  not placed on the board
R78  95300.0  [R0603]  not placed on the board
R79  95300.0  [R0603]  not placed on the board
R80  95300.0  [R0603]  not placed on the board
R81  95300.0  [R0603]  not placed on the board
R82  10000.0  [R0603]  not placed on the board
R83  10000.0  [R0603]  not placed on the board
R84  10000.0  [R0603]  not placed on the board
R85  10000.0  [R0603]  not placed on the board
R86  10000.0  [R0603]  not placed on the board
R87  75000.0  [R0603]  not placed on the board
U1  TMS320DM8147SCYE2  [BFBGA-684]  60.48,12.7 0 top
U2  MD-40S  [MD-40S]  4.6,6.35 0 top
U3  MAX4995AAUT+T  [SOT-23-6]  32.54,72.39 0 top
U4  AT25M01-SSHM-T  [SOIC-8]  63.02,48.26 0 top
U5  BMC150  [LGA14R35P5X6_200X200X100]  2.06,66.04 0 top
U6  MCP2562-E/SN  [SOIC-8]  49.05,48.26 0 top
U7  182-009-113R531  [182-009-MALE]  22.38,6.35 0 top
U8  MT28EW128ABA1HPC-0SIT  [LBGA-64]  not placed on the board
U9  RTL8201FL-VB-CG  [RTL8201FL-VB-CG]  76.99,31.75 0 top
U10  7498011122R  [7498011122R]  82.07,7.62 0 top
U11  47590-0001  [MICRO_USB_AB]  51.59,36.83 0 top
U12  prtr5v0u2ax  [SOT143B]  not placed on the board
U13  ABLS-20.000MHZ-B4-T  [ABLS-20.000MHZ-B4-T]  57.94,67.31 0 top
U14  ABLS-20.000MHZ-B4-T  [ABLS-20.000MHZ-B4-T]  37.62,67.31 0 top
U15  ABLS-25.000MHZ-B2F-T  [ABLS-25.000MHZ-B2F-T]  78.26,67.31 0 top
U16  tps54525PWP  [HTSSOP14]  26.19,66.04 0 top
U17  LP3878SDX-ADJ/NOPB  [WSON-8]  59.21,55.88 0 top
U18  LTC3601EUD#PBF  [QFN-16_EP]  not placed on the board
U19  LP2954AIMX/NOPB  [LP2954]  79.53,48.26 0 top
U20  LTC3601EUD#PBF  [QFN-16_EP]  not placed on the board
U21  LP2951ACSDX/NOPB  [WSON-8]  41.43,55.88 0 top
U22  LP2951ACSDX/NOPB  [WSON-8]  23.65,55.88 0 top
U23  LTC2928CUHF#PBF  [QFN-38_UHF]  17.3,57.15 0 top
U24  IRF8306MTRPbF  [IRF8306MTRPBF]  31.27,48.26 0 top
U25  IRF8306MTRPbF  [IRF8306MTRPBF]  16.03,48.26 0 top
U26  IRF8306MTRPbF  [IRF8306MTRPBF]  0.79,48.26 0 top
U27  IRF8306MTRPbF  [IRF8306MTRPBF]  not placed on the board
U28  4-1437565-2  [SW_4-1437565-2]  22.38,34.29 0 top
U29  Q65110A2395  [LGM67K-G1J2-24-Z]  17.3,66.04 0 top
U30  nc7sz125m5x  [NC7SZ125M5X]  27.46,73.66 0 top
U31  nc7sz125m5x  [NC7SZ125M5X]  21.11,73.66 0 top
U32  nc7sz125m5x  [NC7SZ125M5X]  14.76,73.66 0 top

## Library data of the parts
C1-C185 I1 I5-I7 J1 R1-R87 U1-U32 = circuit_tree

## Nets
CLK_CRYSTAL_U1_AH2: C1.1 U1.AH2 U13.1
CLK_CRYSTAL_U1_AH3: C2.1 U1.AH3 U13.2
CLK_CRYSTAL_U1_R1: C3.1 U1.R1 U14.1
CLK_CRYSTAL_U1_T1: C4.1 U1.T1 U14.2
CLK_CRYSTAL_U9_42: C151.1 U9.42 U15.1
CLK_CRYSTAL_U9_43: C150.1 U9.43 U15.2
GND: C1.2 C2.2 C3.2 C4.2 C5.2 C6.2 C7.2 C8.2 C9.2 C10.2 C11.2 C12.2 C13.2 C14.2 C15.2 C16.2 C17.2 C18.2 C19.2 C20.2 C21.2 C22.2 C23.2 C24.2 C25.2 C26.2 C27.2 C28.2 C29.2 C30.2 C31.2 C32.2 C33.2 C34.2 C35.2 C36.2 C37.2 C38.2 C39.2 C40.2 C41.2 C42.2 C43.2 C44.2 C45.2 C46.2 C47.2 C48.2 C49.2 C50.2 C51.2 C52.2 C53.2 C54.2 C55.2 C56.2 C57.2 C58.2 C59.2 C60.2 C61.2 C62.2 C63.2 C64.2 C65.2 C66.2 C67.2 C68.2 C69.2 C70.2 C71.2 C72.2 C73.2 C74.2 C75.2 C76.2 C77.2 C78.2 C79.2 C80.2 C81.2 C82.2 C83.2 C84.2 C85.2 C86.2 C87.2 C88.2 C89.2 C90.2 C91.2 C92.2 C93.2 C94.2 C95.2 C96.2 C97.2 C98.2 C99.2 C100.2 C101.2 C102.2 C103.2 C104.2 C105.2 C106.2 C107.2 C108.2 C109.2 C110.2 C111.2 C112.2 C113.2 C114.2 C115.2 C116.2 C117.2 C118.2 C119.2 C120.2 C121.2 C122.2 C123.2 C124.2 C125.2 C126.2 C127.2 C128.2 C129.2 C130.2 C131.2 C132.2 C133.2 C134.2 C135.2 C136.2 C137.2 C138.2 C139.2 C140.2 C141.2 C142.2 C143.2 C144.2 C145.2 C146.2 C147.2 C148.2 C149.2 C150.2 C151.2 C152.2 C153.2 C155.2 C156.2 C157.2 C158.2 C159.2 C160.2 C161.2 C162.2 C163.2 C165.1 C165.2 C166.2 C167.2 C168.2 C169.2 C171.1 C171.2 C172.2 C173.2 C174.2 C175.2 C176.2 C177.2 C178.2 C179.2 C180.2 C181.2 C182.2 C183.2 C184.2 C185.2 J1.2 R9.2 R10.2 R11.2 R14.2 R15.2 R16.2 R17.2 R18.2 R19.2 R20.2 R21.2 R22.2 R23.2 R24.2 R25.2 R26.2 R27.2 R28.2 R29.2 R30.2 R41.2 R42.2 R45.2 R47.2 R49.2 R50.2 R54.2 R57.2 R58.2 R60.2 R64.2 R65.2 R67.2 R70.2 R73.2 R75.2 R78.2 R79.2 R80.2 R81.2 R82.2 R83.2 R84.2 R85.2 R86.2 U1.A1 U1.A12 U1.A17 U1.A28 U1.AA14 U1.AA16 U1.AA19 U1.AD21 U1.AE1 U1.AE2 U1.AE9 U1.AE20 U1.AF23 U1.AG1 U1.AG3 U1.AH1 U1.AH28 U1.D9 U1.D20 U1.E8 U1.E20 U1.J12 U1.J14 U1.J19 U1.K10 U1.K11 U1.K13 U1.K14 U1.K15 U1.K16 U1.K17 U1.K19 U1.L8 U1.L13 U1.L14 U1.L16 U1.L22 U1.M9 U1.M15 U1.M17 U1.M19 U1.M21 U1.N8 U1.N12 U1.N15 U1.N16 U1.N20 U1.N21 U1.N22 U1.P13 U1.P15 U1.P17 U1.P19 U1.P21 U1.R2 U1.R8 U1.R9 U1.R10 U1.R12 U1.R14 U1.R16 U1.R21 U1.R22 U1.T8 U1.T9 U1.T13 U1.T14 U1.T17 U1.T18 U1.T19 U1.T21 U1.T22 U1.U12 U1.U14 U1.U18 U1.U20 U1.U26 U1.V7 U1.V9 U1.V11 U1.V12 U1.V13 U1.V17 U1.V18 U1.V19 U1.V21 U1.W12 U1.W16 U1.W17 U1.Y1 U1.Y2 U1.Y10 U1.Y12 U1.Y15 U1.Y17 U1.Y18 U1.Y19 U1.Y26 U2.1 U2.2 U3.2 U4.4 U5.1 U5.6 U5.7 U5.9 U6.2 U6.8 U7.5 U8.E8 U8.H2 U8.H7 U9.7 U9.20 U9.33 U9.47 U10.11 U11.5 U11.6 U11.7 U11.8 U11.9 U12.1 U16.5 U16.8 U16.9 U16.15 U17.3 U17.PAD U18.1 U18.9 U18.17 U19.4 U20.1 U20.9 U20.17 U21.3 U21.4 U21.PAD U22.3 U22.4 U22.PAD U23.10 U23.12 U23.13 U23.24 U23.25 U23.39 U30.1 U30.3 U31.1 U31.3 U32.1 U32.3
NET_U1_AA4: R4.1
NET_U1_AA15: U1.AA15 U1.AA17 U1.AB14 U1.AB16 U1.M8 U1.N7 U1.P8 U1.T7 U1.U21 U1.U22 U1.V20 U1.Y11 U1.Y16
NET_U1_AB6: R6.1 U1.AB6 U5.14
NET_U1_AC4: R5.1 U1.AC4 U5.11
NET_U1_AG22: R13.2 U1.AG22
NET_U1_AG23: R12.2 U1.AG23
NET_U1_B1: R11.1 U1.B1
NET_U1_B27: R10.1 U1.B27
NET_U1_G14: C7.1 C8.1 U1.G14
NET_U1_G15: C5.1 C6.1 U1.G15
NET_U1_H28: R7.1 U1.H28 U9.30
NET_U1_J5: R3.1 U1.J5 U32.4
NET_U1_K12: U1.K9 U1.K12 U1.K18 U1.L15 U1.L17 U1.L19 U1.M16 U1.M18 U1.N17 U1.N19 U1.P12 U1.P14 U1.P16 U1.R15 U1.R17 U1.R19 U1.T12 U1.U11 U1.U13 U1.U17 U1.U19 U1.W11
NET_U1_L18: C13.1 U1.L18
NET_U1_L20: U1.L20
NET_U1_M11: C15.1 U1.M11
NET_U1_N10: C16.1 U1.N10
NET_U1_N11: C17.1 U1.N11
NET_U1_P10: C14.1 U1.P10
NET_U1_P18: C11.1 U1.P18
NET_U1_P24: R8.1 U1.P24 U9.31
NET_U1_R11: C12.1 U1.R11
NET_U1_T10: C18.1 U1.T10
NET_U1_T11: C19.1 U1.T11
NET_U1_U10: U1.U9 U1.U10
NET_U1_V14: C10.1 U1.V14
NET_U1_W10: U1.W9 U1.W10
NET_U1_W14: C9.1 U1.W14
NET_U1_W19: U1.W19 U1.W20
NET_U2_3: U1.AH24 U2.3
NET_U2_4: U1.AH22 U2.4
NET_U3_3: R9.1 U3.3
NET_U3_4: U1.AF11 U3.4
NET_U4_3: R31.1 U4.3
NET_U4_7: R33.1 U4.7
NET_U6_6: R35.2 U6.6
NET_U7_2: R35.2 U6.6 U7.2
NET_U7_3: R35.1 U6.7 U7.3
NET_U8_B4: R39.1 U8.B4
NET_U8_B5: R2.1 U8.B5 U31.4
NET_U9_6: C142.1 C143.1 C144.1 I1.1 U9.6 U9.41
NET_U9_10: R50.1 U9.10
NET_U9_28: U9.28
NET_U9_29: R1.1 U9.29 U30.4
NET_U9_32: R46.1 U9.32
NET_U9_34: R48.1 U9.34
NET_U9_35: R49.1 U9.35
NET_U9_40: C149.1 U9.40
NET_U9_46: R45.1 U9.46
NET_U9_48: C148.1 U9.48
NET_U10_1: U9.1 U10.1
NET_U10_3: U9.2 U10.3
NET_U10_4: U9.4 U10.4
NET_U10_5: C141.1 U10.2 U10.5
NET_U10_6: U9.5 U10.6
NET_U10_8: R42.1 U10.8
NET_U10_10: R43.1 U10.10
NET_U10_12: R44.1 U10.12
NET_U10_13: R41.1 U10.13 U10.14
NET_U10_34: R43.2
NET_U10_35: R44.2
NET_U16_2: R53.2 R54.1 U16.2
NET_U16_3: C152.1 U16.3
NET_U16_4: C153.1 U16.4
NET_U16_10: C154.1 I5.1 U16.10 U16.11
NET_U16_12: C154.2 U16.12
NET_U17_1: C159.1 U17.1
NET_U17_6: R56.2 R57.1 U17.6
NET_U17_8: R55.1 U17.8
NET_U18_3: C164.2 I6.1 U18.3 U18.4
NET_U18_6: C164.1 U18.6
NET_U18_7: C163.1 U18.7 U18.12
NET_U18_10: R60.1 U18.10
NET_U18_11: R58.1 R59.1 U18.11
NET_U18_14: U18.14
NET_U18_ATNET_3: I6.2 R59.2
NET_U19_3: R62.1 U19.3
NET_U19_5: R61.1 U19.5
NET_U19_7: R63.2 R64.1 U19.7
NET_U20_3: C170.2 I7.1 U20.3 U20.4
NET_U20_6: C170.1 U20.6
NET_U20_7: C169.1 U20.7 U20.12
NET_U20_10: R67.1 U20.10
NET_U20_11: R65.1 R66.1 U20.11
NET_U20_14: U20.14
NET_U20_ATNET_3: I7.2 R66.2
NET_U21_5: R68.1 U21.5
NET_U21_7: R69.2 R70.1 U21.7
NET_U22_5: R71.1 U22.5
NET_U22_7: R72.2 R73.1 U22.7
NET_U23_3: R83.1 U23.3
NET_U23_6: R78.1 U23.6
NET_U23_7: R79.1 U23.7
NET_U23_8: R80.1 U23.8
NET_U23_9: R81.1 U23.9
NET_U23_16: R82.1 R87.1 U23.16
NET_U23_18: R77.1 U23.18
NET_U23_19: R76.1 U23.19 U23.20
NET_U23_21: R74.1 R75.1 U23.21 U30.2 U31.2 U32.2
NET_U23_22: C176.1 R74.2 R76.2 R77.2 U23.11 U23.22
NET_U23_26: C179.1 U23.26
NET_U23_27: C178.1 U23.27
NET_U23_28: C180.1 U23.28
NET_U23_30: R86.1 U23.30
NET_U23_32: R85.1 U23.32
NET_U23_38: R84.1 U23.38
NET_U24_3: U23.2 U24.3
NET_U25_3: U23.37 U25.3
NET_U26_3: U23.31 U26.3
NET_U27_3: U23.29 U27.3
NET_U28_1: U28.1 U28.2
NET_U28_3: U28.3 U28.4
PROC_DCAN0_RX: U1.AG6 U6.4
PROC_DCAN0_TX: U1.AH6 U6.1
PROC_EMAC0_MRCLK: U1.H27 U9.19
PROC_EMAC0_MRXD0: U1.G28 U9.14
PROC_EMAC0_MRXD1: U1.P23 U9.16
PROC_EMAC0_MRXD2: U1.R23 U9.17
PROC_EMAC0_MRXD3: R51.1 U1.J25 U9.18
PROC_EMAC0_MRXDV: R47.1 U1.K22 U9.13
PROC_EMAC0_MRXER: R52.1 U1.J26 U9.39
PROC_EMAC1_MCOL: U1.AC24 U9.38
PROC_EMAC1_MCRS: U1.AA23 U9.36
PROC_EMAC1_MTCLK: U1.AE24 U9.22
PROC_EMAC1_MTXD0: U1.AF26 U9.23
PROC_EMAC1_MTXD1: U1.AE26 U9.24
PROC_EMAC1_MTXD2: U1.AD26 U9.25
PROC_EMAC1_MTXD3: U1.AG27 U9.26
PROC_EMAC1_MTXEN: U1.Y24 U9.27
PROC_GPIO_TO_U1_USB_FAULT: U1.AC16 U3.6
PROC_GPMC_A1: U1.T23 U8.E2
PROC_GPMC_A2: U1.H26 U8.D2
PROC_GPMC_A3: U1.M24 U8.C2
PROC_GPMC_A4: U1.L26 U8.A2
PROC_GPMC_A5: U1.AD18 U8.B2
PROC_GPMC_A6: U1.AC18 U8.D3
PROC_GPMC_A7: U1.AC19 U8.C3
PROC_GPMC_A8: U1.AA22 U8.A3
PROC_GPMC_A9: U1.AE23 U8.B6
PROC_GPMC_A10: U1.AD23 U8.A6
PROC_GPMC_A11: U1.AB23 U8.C6
PROC_GPMC_A12: U1.AF18 U8.D6
PROC_GPMC_A13: U1.J22 U8.B7
PROC_GPMC_A14: U1.H24 U8.A7
PROC_GPMC_A15: U1.J23 U8.C7
PROC_GPMC_A16: U1.AD27 U8.D7
PROC_GPMC_A17: U1.V23 U8.E7
PROC_GPMC_A18: U1.AE28 U8.B3
PROC_GPMC_A19: U1.AC27 U8.C4
PROC_GPMC_A20: U1.AD28 U8.D5
PROC_GPMC_A21: U1.AC28 U8.D4
PROC_GPMC_A22: R17.1 U1.AB27 U8.C5
PROC_GPMC_A23: U1.R24 U8.B8
PROC_GPMC_BE0_CLE: R40.1 U1.U27 U8.F7
PROC_GPMC_CS0: R36.1 U1.T28 U8.F2
PROC_GPMC_D0: R18.1 U1.U26 U8.E3
PROC_GPMC_D1: R19.1 U1.Y28 U8.H3
PROC_GPMC_D2: R20.1 U1.V27 U8.E4
PROC_GPMC_D3: R21.1 U1.W27 U8.H4
PROC_GPMC_D4: R22.1 U1.V26 U8.H5
PROC_GPMC_D5: R16.1 U1.AA28 U8.E5
PROC_GPMC_D6: R15.1 U1.U25 U8.H6
PROC_GPMC_D7: R14.1 U1.V25 U8.E6
PROC_GPMC_D8: R26.1 U1.Y27 U8.F3
PROC_GPMC_D9: R25.1 U1.AB28 U8.G3
PROC_GPMC_D10: R27.1 U1.Y26 U8.F4
PROC_GPMC_D11: R23.1 U1.AA27 U8.G4
PROC_GPMC_D12: R28.1 U1.U24 U8.F5
PROC_GPMC_D13: R30.1 U1.U23 U8.G6
PROC_GPMC_D14: R29.1 U1.V24 U8.F6
PROC_GPMC_D15: R24.1 U1.Y25 U8.G7
PROC_GPMC_OE_RE_B: R37.1 U1.T27 U8.G2
PROC_GPMC_WAIT0: U1.W28 U8.A4
PROC_GPMC_WE_B: R38.1 U1.U28 U8.A5
PROC_SPI0_D0: U1.AE3 U4.5
PROC_SPI0_D1: U1.AF3 U4.2
PROC_SPI0_SCLK: U1.AC7 U4.6
PROC_SPI0_SCS0: R32.1 U1.AD6 U4.1
PROC_USB0_DM: U1.AH11 U11.2 U12.3
PROC_USB0_DP: U1.AG11 U11.3 U12.2
PROC_USB0_ID: U1.AG10 U11.4
PROC_USB0_VBUSIN: U1.AG12 U3.1 U11.1 U12.4
VCC_9V5: C177.1 C181.1 C182.1 J1.1 R87.2 U23.23 U24.1 U24.2 U24.6 U24.7 U25.1 U25.2 U25.6 U25.7 U26.1 U26.2 U26.6 U26.7 U27.1 U27.2 U27.6 U27.7
VCC_S1_9V5: C157.1 C158.1 C160.1 R55.2 U16.7 U16.13 U16.14 U17.4 U24.4 U24.5
VCC_S2_9V5: C162.1 U18.15 U18.16 U25.4 U25.5
VCC_S3_9V5: C166.1 C168.1 C172.1 R62.2 U19.8 U20.15 U20.16 U21.8 U26.4 U26.5
VCC_S4_9V5: C174.1 U22.8 U27.4 U27.5
VCC_TIER1_1V28: C41.1 C42.1 C43.1 C44.1 C45.1 C46.1 C47.1 C48.1 C49.1 C50.1 C51.1 C52.1 C53.1 C54.1 C55.1 C56.1 C57.1 C58.1 C59.1 C60.1 C61.1 C62.1 C63.1 C64.1 C65.1 C66.1 C67.1 C68.1 C69.1 C70.1 C71.1 C72.1 C73.1 C74.1 C75.1 C76.1 C77.1 C78.1 C79.1 C80.1 C81.1 C82.1 C83.1 C84.1 C85.1 C86.1 C155.1 C156.1 I5.2 R53.1 U1.K9 U1.K10 U1.L9 U1.L10 U1.L11 U1.L12 U1.L14 U1.L15 U1.M10 U1.M12 U1.M13 U1.M14 U1.N9 U1.N13 U1.N14 U1.T14 U1.T15 U1.T16 U1.U15 U1.U16 U1.V15 U1.V16 U16.1
VCC_TIER1_5V0: C161.1 R56.1 U3.5 U17.5
VCC_TIER2_1V43: C87.1 C88.1 C89.1 C90.1 C91.1 C92.1 C93.1 C94.1 C95.1 C96.1 C97.1 C98.1 C99.1 C100.1 C101.1 C102.1 C103.1 C104.1 C105.1 C106.1 C107.1 C108.1 C165.2 I6.2 R59.2 U1.E8 U1.E9 U1.E20 U1.E21 U1.G13 U1.G16 U1.H12 U1.H13 U1.H14 U1.H16 U1.H17 U1.J10 U1.J11 U1.J13 U1.J15 U1.J16 U1.J17 U1.J18 U18.8
VCC_TIER3_1V8: C36.1 C37.1 C38.1 C39.1 C109.1 C110.1 C111.1 C112.1 C113.1 C114.1 C115.1 C116.1 C117.1 C118.1 C119.1 C120.1 C121.1 C122.1 C123.1 C124.1 C125.1 C126.1 C127.1 C128.1 C129.1 C130.1 C131.1 C132.1 C133.1 C135.1 C167.1 C183.1 C184.1 C185.1 R61.2 R63.1 U1.AA12 U1.AA18 U1.AB18 U1.AB19 U1.H15 U1.L20 U1.M7 U1.M22 U1.N18 U1.P7 U1.P9 U1.P11 U1.P20 U1.R10 U1.R13 U1.R18 U1.R20 U1.T20 U1.U7 U1.U9 U1.V10 U1.W9 U1.W13 U1.W15 U1.W18 U1.Y13 U5.8 U19.1 U30.5 U31.5 U32.5
VCC_TIER3_3V3: C20.1 C21.1 C22.1 C23.1 C24.1 C25.1 C26.1 C27.1 C28.1 C29.1 C30.1 C31.1 C32.1 C33.1 C34.1 C35.1 C134.1 C136.1 C138.1 C139.1 C140.1 C145.1 C146.1 C147.1 C171.2 I1.2 I7.2 R1.2 R2.2 R3.2 R4.2 R5.2 R6.2 R7.2 R8.2 R31.2 R32.2 R33.2 R34.1 R34.2 R36.2 R37.2 R38.2 R39.2 R40.2 R46.2 R48.2 R51.2 R52.2 R66.2 U1.K20 U1.L21 U1.M8 U1.M20 U1.N7 U4.8 U5.10 U5.12 U5.13 U6.5 U8.D8 U8.F1 U8.G5 U9.15 U9.21 U9.37 U20.8
VCC_TIER3_5V0: C137.1 C173.1 R68.2 R69.1 U6.3 U21.1
VCC_TIER4_3V3: C40.1 C175.1 R71.2 R72.1 U1.AA13 U22.1

## Tracks (layer width: path | path; a pad name or v marks a point on that pad's centre or on a via)
CLK_CRYSTAL_U1_AH2  (2 unrouted)
CLK_CRYSTAL_U1_AH3  (2 unrouted)
CLK_CRYSTAL_U1_R1  (2 unrouted)
CLK_CRYSTAL_U1_T1  (2 unrouted)
CLK_CRYSTAL_U9_42  (2 unrouted)
CLK_CRYSTAL_U9_43  (2 unrouted)
GND  (383 unrouted)
NET_U1_AA15  (12 unrouted)
NET_U1_AB6  (2 unrouted)
NET_U1_AC4  (2 unrouted)
NET_U1_AG22  (1 unrouted)
NET_U1_AG23  (1 unrouted)
NET_U1_B1  (1 unrouted)
NET_U1_B27  (1 unrouted)
NET_U1_G14  (2 unrouted)
NET_U1_G15  (2 unrouted)
NET_U1_H28  (2 unrouted)
NET_U1_J5  (2 unrouted)
NET_U1_K12  (21 unrouted)
NET_U1_L18  (1 unrouted)
NET_U1_M11  (1 unrouted)
NET_U1_N10  (1 unrouted)
NET_U1_N11  (1 unrouted)
NET_U1_P10  (1 unrouted)
NET_U1_P18  (1 unrouted)
NET_U1_P24  (2 unrouted)
NET_U1_R11  (1 unrouted)
NET_U1_T10  (1 unrouted)
NET_U1_T11  (1 unrouted)
NET_U1_U10  (1 unrouted)
NET_U1_V14  (1 unrouted)
NET_U1_W10  (1 unrouted)
NET_U1_W14  (1 unrouted)
NET_U1_W19  (1 unrouted)
NET_U2_3  (1 unrouted)
NET_U2_4  (1 unrouted)
NET_U3_3  (1 unrouted)
NET_U3_4  (1 unrouted)
NET_U4_3  (1 unrouted)
NET_U4_7  (1 unrouted)
NET_U6_6  (1 unrouted)
NET_U7_2  (2 unrouted)
NET_U7_3  (2 unrouted)
NET_U8_B4  (1 unrouted)
NET_U8_B5  (2 unrouted)
NET_U9_6  (5 unrouted)
NET_U9_10  (1 unrouted)
NET_U9_29  (2 unrouted)
NET_U9_32  (1 unrouted)
NET_U9_34  (1 unrouted)
NET_U9_35  (1 unrouted)
NET_U9_40  (1 unrouted)
NET_U9_46  (1 unrouted)
NET_U9_48  (1 unrouted)
NET_U10_1  (1 unrouted)
NET_U10_3  (1 unrouted)
NET_U10_4  (1 unrouted)
NET_U10_5  (2 unrouted)
NET_U10_6  (1 unrouted)
NET_U10_8  (1 unrouted)
NET_U10_10  (1 unrouted)
NET_U10_12  (1 unrouted)
NET_U10_13  (2 unrouted)
NET_U16_2  (2 unrouted)
NET_U16_3  (1 unrouted)
NET_U16_4  (1 unrouted)
NET_U16_10  (3 unrouted)
NET_U16_12  (1 unrouted)
NET_U17_1  (1 unrouted)
NET_U17_6  (2 unrouted)
NET_U17_8  (1 unrouted)
NET_U18_3  (3 unrouted)
NET_U18_6  (1 unrouted)
NET_U18_7  (2 unrouted)
NET_U18_10  (1 unrouted)
NET_U18_11  (2 unrouted)
NET_U18_ATNET_3  (1 unrouted)
NET_U19_3  (1 unrouted)
NET_U19_5  (1 unrouted)
NET_U19_7  (2 unrouted)
NET_U20_3  (3 unrouted)
NET_U20_6  (1 unrouted)
NET_U20_7  (2 unrouted)
NET_U20_10  (1 unrouted)
NET_U20_11  (2 unrouted)
NET_U20_ATNET_3  (1 unrouted)
NET_U21_5  (1 unrouted)
NET_U21_7  (2 unrouted)
NET_U22_5  (1 unrouted)
NET_U22_7  (2 unrouted)
NET_U23_3  (1 unrouted)
NET_U23_6  (1 unrouted)
NET_U23_7  (1 unrouted)
NET_U23_8  (1 unrouted)
NET_U23_9  (1 unrouted)
NET_U23_16  (2 unrouted)
NET_U23_18  (1 unrouted)
NET_U23_19  (2 unrouted)
NET_U23_21  (5 unrouted)
NET_U23_22  (5 unrouted)
NET_U23_26  (1 unrouted)
NET_U23_27  (1 unrouted)
NET_U23_28  (1 unrouted)
NET_U23_30  (1 unrouted)
NET_U23_32  (1 unrouted)
NET_U23_38  (1 unrouted)
NET_U24_3  (1 unrouted)
NET_U25_3  (1 unrouted)
NET_U26_3  (1 unrouted)
NET_U27_3  (1 unrouted)
NET_U28_1  (1 unrouted)
NET_U28_3  (1 unrouted)
PROC_DCAN0_RX  (1 unrouted)
PROC_DCAN0_TX  (1 unrouted)
PROC_EMAC0_MRCLK  (1 unrouted)
PROC_EMAC0_MRXD0  (1 unrouted)
PROC_EMAC0_MRXD1  (1 unrouted)
PROC_EMAC0_MRXD2  (1 unrouted)
PROC_EMAC0_MRXD3  (2 unrouted)
PROC_EMAC0_MRXDV  (2 unrouted)
PROC_EMAC0_MRXER  (2 unrouted)
PROC_EMAC1_MCOL  (1 unrouted)
PROC_EMAC1_MCRS  (1 unrouted)
PROC_EMAC1_MTCLK  (1 unrouted)
PROC_EMAC1_MTXD0  (1 unrouted)
PROC_EMAC1_MTXD1  (1 unrouted)
PROC_EMAC1_MTXD2  (1 unrouted)
PROC_EMAC1_MTXD3  (1 unrouted)
PROC_EMAC1_MTXEN  (1 unrouted)
PROC_GPIO_TO_U1_USB_FAULT  (1 unrouted)
PROC_GPMC_A1  (1 unrouted)
PROC_GPMC_A2  (1 unrouted)
PROC_GPMC_A3  (1 unrouted)
PROC_GPMC_A4  (1 unrouted)
PROC_GPMC_A5  (1 unrouted)
PROC_GPMC_A6  (1 unrouted)
PROC_GPMC_A7  (1 unrouted)
PROC_GPMC_A8  (1 unrouted)
PROC_GPMC_A9  (1 unrouted)
PROC_GPMC_A10  (1 unrouted)
PROC_GPMC_A11  (1 unrouted)
PROC_GPMC_A12  (1 unrouted)
PROC_GPMC_A13  (1 unrouted)
PROC_GPMC_A14  (1 unrouted)
PROC_GPMC_A15  (1 unrouted)
PROC_GPMC_A16  (1 unrouted)
PROC_GPMC_A17  (1 unrouted)
PROC_GPMC_A18  (1 unrouted)
PROC_GPMC_A19  (1 unrouted)
PROC_GPMC_A20  (1 unrouted)
PROC_GPMC_A21  (1 unrouted)
PROC_GPMC_A22  (2 unrouted)
PROC_GPMC_A23  (1 unrouted)
PROC_GPMC_BE0_CLE  (2 unrouted)
PROC_GPMC_CS0  (2 unrouted)
PROC_GPMC_D0  (2 unrouted)
PROC_GPMC_D1  (2 unrouted)
PROC_GPMC_D2  (2 unrouted)
PROC_GPMC_D3  (2 unrouted)
PROC_GPMC_D4  (2 unrouted)
PROC_GPMC_D5  (2 unrouted)
PROC_GPMC_D6  (2 unrouted)
PROC_GPMC_D7  (2 unrouted)
PROC_GPMC_D8  (2 unrouted)
PROC_GPMC_D9  (2 unrouted)
PROC_GPMC_D10  (2 unrouted)
PROC_GPMC_D11  (2 unrouted)
PROC_GPMC_D12  (2 unrouted)
PROC_GPMC_D13  (2 unrouted)
PROC_GPMC_D14  (2 unrouted)
PROC_GPMC_D15  (2 unrouted)
PROC_GPMC_OE_RE_B  (2 unrouted)
PROC_GPMC_WAIT0  (1 unrouted)
PROC_GPMC_WE_B  (2 unrouted)
PROC_SPI0_D0  (1 unrouted)
PROC_SPI0_D1  (1 unrouted)
PROC_SPI0_SCLK  (1 unrouted)
PROC_SPI0_SCS0  (2 unrouted)
PROC_USB0_DM  (2 unrouted)
PROC_USB0_DP  (2 unrouted)
PROC_USB0_ID  (1 unrouted)
PROC_USB0_VBUSIN  (3 unrouted)
VCC_9V5  (21 unrouted)
VCC_S1_9V5  (9 unrouted)
VCC_S2_9V5  (4 unrouted)
VCC_S3_9V5  (9 unrouted)
VCC_S4_9V5  (3 unrouted)
VCC_TIER1_1V28  (72 unrouted)
VCC_TIER1_5V0  (3 unrouted)
VCC_TIER2_1V43  (43 unrouted)
VCC_TIER3_1V8  (66 unrouted)
VCC_TIER3_3V3  (66 unrouted)
VCC_TIER3_5V0  (5 unrouted)
VCC_TIER4_3V3  (5 unrouted)